# EAGLE board BusPirate-ultra.v1.0b (EAGLE 9.1.3), part 1 of 2
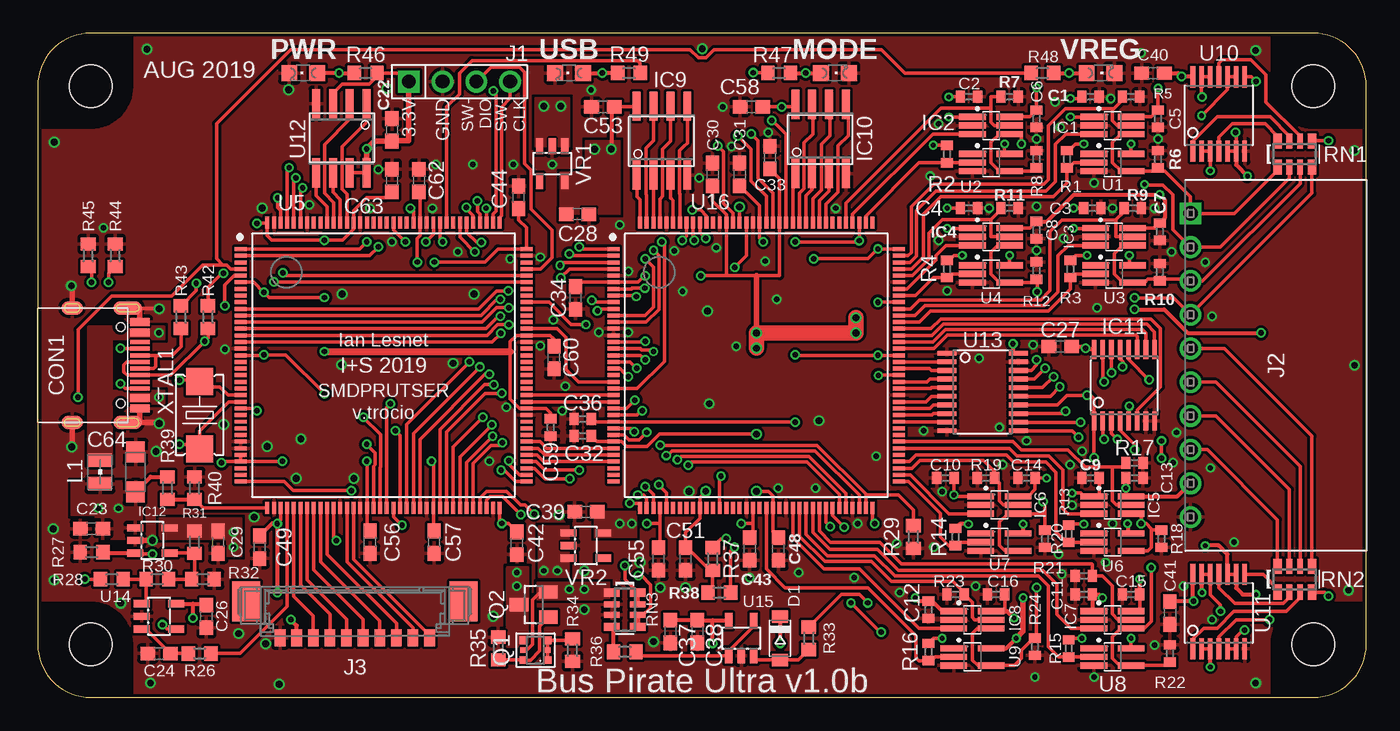
[diagram p0: board, top side]
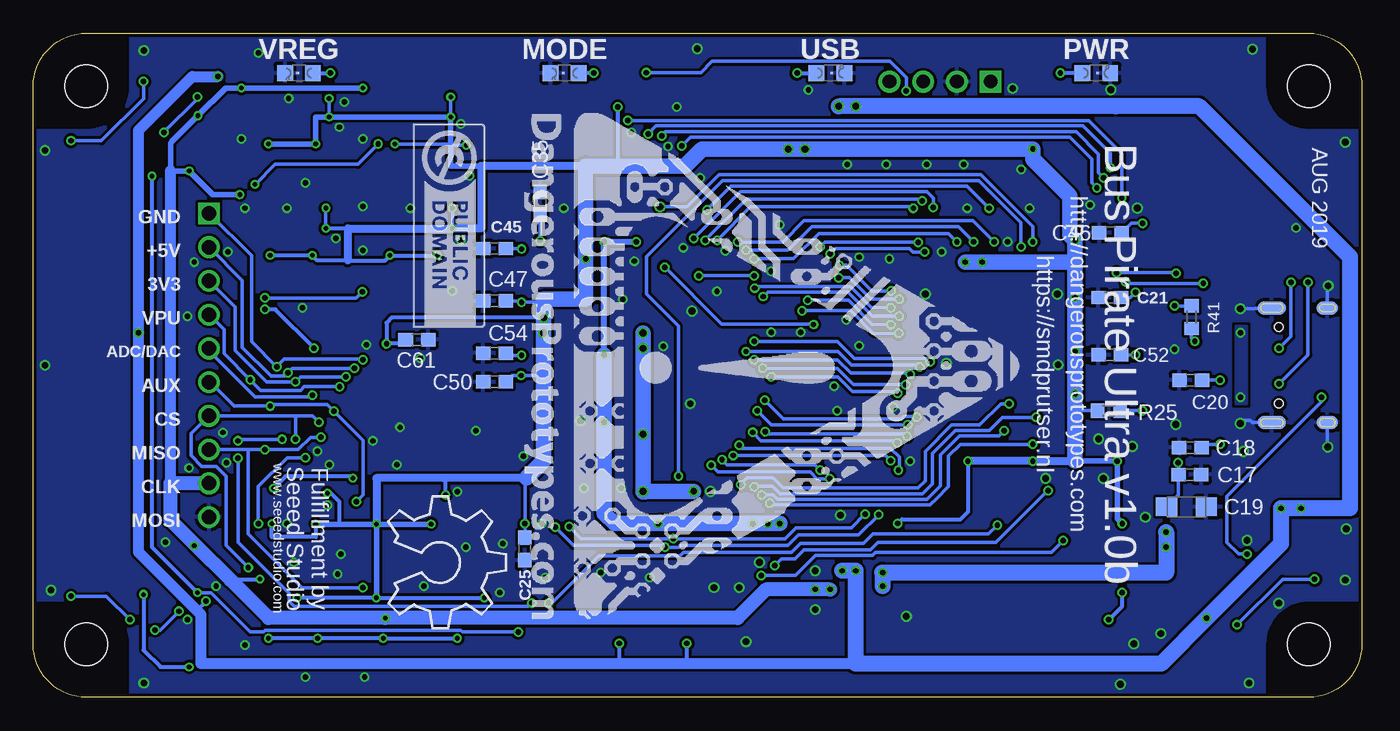
[diagram p1: board, bottom side, seen from below]

Size 100 x 50 mm. Coordinates in mm from the lower left corner, seen from the top.
Copper layers (1*16): Top 0.035mm / dielectric 1.5mm / Bottom 0.035mm
Design rules "dirt_cheap_dirty_boards.v1.1": minimum track width 6mil, minimum drill 12mil, track to track 6mil, track to pad 6mil, pad to pad 6mil, via to via 6mil, smd to smd 0mil, copper to edge 10mil, drill to drill 10mil, minimum pad ring 10mil, minimum via ring 6mil, stop-mask expansion 2mil, vias tented up to drill 25mil, thermal gap 10mil

## Footprints (pad centres in the part's own frame; a part is rotated, then mirrored left to right if it is on the bottom)
C0402 = smd 0.7 x 0.9: 1 -0.65,0; 2 0.65,0
C0603 = smd 1.1 x 1: 1 -0.85,0; 2 0.85,0
SMC_A = smd 1.6 x 1.4: + -1.5,0; - 1.5,0
C603 = smd 1.1 x 1: 1 -0.85,0; 2 0.85,0
C402 = smd 0.7 x 0.9: 1 -0.65,0; 2 0.65,0
C-31-M-12 = smd 0.3 x 1.45: CC1 -1.25,3.005; CC2 1.75,3.005; DN1 0.25,3.005; DN2 -0.75,3.005; DP1 -0.25,3.005; DP2 0.75,3.005; SBU1 1.25,3.005; SBU2 -1.75,3.005 | smd 0.6 x 1.45: GND@1 -3.25,3.005; GND@2 3.25,3.005; VBUS@1 -2.45,3.005; VBUS@2 2.45,3.005 | smd 1 x 2.1: P$1 4.32,2.09; P$2 -4.32,2.09 | smd 1 x 1.6: P$3 -4.32,-2.09; P$4 4.32,-2.09 | smd 1 x 2.1 bottom: P$5 -4.32,2.09; P$8 4.32,2.09 | smd 1 x 1.6 bottom: P$6 -4.32,-2.09; P$7 4.32,-2.09 | hole 0.65: 2.89,1.56; -2.89,1.56
SOD-123 = smd 0.91 x 1.22: A 1.635,0; C -1.635,0
SC-70-6_EXTENDED_PADS = smd 0.47 x 2: 1 -0.65,-1.4; 2 0,-1.4; 3 0.65,-1.4; 4 0.65,1.4; 5 0,1.4; 6 -0.65,1.4
SOIC-8 = smd 0.6 x 2.2: 1 -1.905,-2.6; 2 -0.635,-2.6; 3 0.635,-2.6; 4 1.905,-2.6; 5 1.905,2.6; 6 0.635,2.6; 7 -0.635,2.6; 8 -1.905,2.6
TSSOP-16 = smd 0.35 x 1.43: 1 -2.275,-2.7; 2 -1.625,-2.7; 3 -0.975,-2.7; 4 -0.325,-2.7; 5 0.325,-2.7; 6 0.975,-2.7; 7 1.625,-2.7; 8 2.275,-2.7; 9 2.275,2.7; 10 1.625,2.7; 11 0.975,2.7; 12 0.325,2.7; 13 -0.325,2.7; 14 -0.975,2.7; 15 -1.625,2.7; 16 -2.275,2.7
SOT-23-5 = smd 0.55 x 1.2: 1 -0.95,-1.3; 2 0,-1.3; 3 0.95,-1.3; 4 0.95,1.3; 5 -0.95,1.3
M1X4 = drill 1.02 pad 1.632 square: 1 0,0 | drill 1.02 pad 1.632: 2 2.54,0; 3 5.08,0; 4 7.62,0
M1X10_MALE_RIGHT_ANGLES_PTH_SHROUDED = drill 1.09 square: 1 -11.43,-6.415 | drill 1.09: 2 -8.89,-6.415; 3 -6.35,-6.415; 4 -3.81,-6.415; 5 -1.27,-6.415; 6 1.27,-6.415; 7 3.81,-6.415; 8 6.35,-6.415; 9 8.89,-6.415; 10 11.43,-6.415
MOLEX_533980771 = smd 2.1 x 3: B1 -8.175,1.513; B2 8.175,1.513 | smd 0.8 x 1.3: P1 5.625,-1.238; P2 4.375,-1.238; P3 3.125,-1.238; P4 1.875,-1.238; P5 0.625,-1.238; P6 -0.625,-1.238; P7 -1.875,-1.238; P8 -3.125,-1.238; P9 -4.375,-1.238; P10 -5.625,-1.238
WE-KI_0805_B = smd 1.02 x 1.78: 1 -0.89,0; 2 0.89,0
LED-805 = smd 1.2 x 1.2: A 0,-1.05; C 0,1.05
DP10050_V1 = hole 3.2: 4,4; 96,4; 96,46; 4,46
SOT-363 = smd 0.6 x 0.6: 1 -0.75,-0.9; 3 0.75,-0.9; 4 0.75,0.9; 6 -0.75,0.9 | smd 0.4 x 0.5: 2 0,-0.9; 5 0,0.9
SOT-23 = smd 1 x 1.4: 1 -0.95,-1.1; 2 0.95,-1.1; 3 0,1.1
R0402 = smd 0.7 x 0.9: 1 -0.65,0; 2 0.65,0
R603 = smd 1 x 1.1: 1 -0.85,0; 2 0.85,0
R0603 = smd 1 x 1.1: 1 -0.85,0; 2 0.85,0
RN8P-4R-CRA06S = smd 0.63 x 1.15: 1 -1.295,-0.975; 4 1.295,-0.975; 5 1.295,0.975; 8 -1.295,0.975 | smd 0.44 x 1.15: 2 -0.4,-0.975; 3 0.4,-0.975; 6 0.4,0.975; 7 -0.4,0.975
SC-70-5_EXTENDED_PADS = smd 0.47 x 2: 1 -0.65,-1.4; 2 0,-1.4; 3 0.65,-1.4; 4 0.65,1.4; 5 -0.65,1.4
TQFP-144 = smd 0.9 x 0.3: 1 -10.75,8.75; 2 -10.75,8.25; 3 -10.75,7.75; 4 -10.75,7.25; 5 -10.75,6.75; 6 -10.75,6.25; 7 -10.75,5.75; 8 -10.75,5.25; 9 -10.75,4.75; 10 -10.75,4.25; 11 -10.75,3.75; 12 -10.75,3.25; 13 -10.75,2.75; 14 -10.75,2.25; 15 -10.75,1.75; 16 -10.75,1.25; 17 -10.75,0.75; 18 -10.75,0.25; 19 -10.75,-0.25; 20 -10.75,-0.75; 21 -10.75,-1.25; 22 -10.75,-1.75; 23 -10.75,-2.25; 24 -10.75,-2.75; 25 -10.75,-3.25; 26 -10.75,-3.75; 27 -10.75,-4.25; 28 -10.75,-4.75; 29 -10.75,-5.25; 30 -10.75,-5.75; 31 -10.75,-6.25; 32 -10.75,-6.75; 33 -10.75,-7.25; 34 -10.75,-7.75; 35 -10.75,-8.25; 36 -10.75,-8.75; 73 10.75,-8.75; 74 10.75,-8.25; 75 10.75,-7.75; 76 10.75,-7.25; 77 10.75,-6.75; 78 10.75,-6.25; 79 10.75,-5.75; 80 10.75,-5.25; 81 10.75,-4.75; 82 10.75,-4.25; 83 10.75,-3.75; 84 10.75,-3.25; 85 10.75,-2.75; 86 10.75,-2.25; 87 10.75,-1.75; 88 10.75,-1.25; 89 10.75,-0.75; 90 10.75,-0.25; 91 10.75,0.25; 92 10.75,0.75; 93 10.75,1.25; 94 10.75,1.75; 95 10.75,2.25; 96 10.75,2.75; 97 10.75,3.25; 98 10.75,3.75; 99 10.75,4.25; 100 10.75,4.75; 101 10.75,5.25; 102 10.75,5.75; 103 10.75,6.25; 104 10.75,6.75; 105 10.75,7.25; 106 10.75,7.75; 107 10.75,8.25; 108 10.75,8.75 | smd 0.3 x 0.9: 37 -8.75,-10.75; 38 -8.25,-10.75; 39 -7.75,-10.75; 40 -7.25,-10.75; 41 -6.75,-10.75; 42 -6.25,-10.75; 43 -5.75,-10.75; 44 -5.25,-10.75; 45 -4.75,-10.75; 46 -4.25,-10.75; 47 -3.75,-10.75; 48 -3.25,-10.75; 49 -2.75,-10.75; 50 -2.25,-10.75; 51 -1.75,-10.75; 52 -1.25,-10.75; 53 -0.75,-10.75; 54 -0.25,-10.75; 55 0.25,-10.75; 56 0.75,-10.75; 57 1.25,-10.75; 58 1.75,-10.75; 59 2.25,-10.75; 60 2.75,-10.75; 61 3.25,-10.75; 62 3.75,-10.75; 63 4.25,-10.75; 64 4.75,-10.75; 65 5.25,-10.75; 66 5.75,-10.75; 67 6.25,-10.75; 68 6.75,-10.75; 69 7.25,-10.75; 70 7.75,-10.75; 71 8.25,-10.75; 72 8.75,-10.75; 109 8.75,10.75; 110 8.25,10.75; 111 7.75,10.75; 112 7.25,10.75; 113 6.75,10.75; 114 6.25,10.75; 115 5.75,10.75; 116 5.25,10.75; 117 4.75,10.75; 118 4.25,10.75; 119 3.75,10.75; 120 3.25,10.75; 121 2.75,10.75; 122 2.25,10.75; 123 1.75,10.75; 124 1.25,10.75; 125 0.75,10.75; 126 0.25,10.75; 127 -0.25,10.75; 128 -0.75,10.75; 129 -1.25,10.75; 130 -1.75,10.75; 131 -2.25,10.75; 132 -2.75,10.75; 133 -3.25,10.75; 134 -3.75,10.75; 135 -4.25,10.75; 136 -4.75,10.75; 137 -5.25,10.75; 138 -5.75,10.75; 139 -6.25,10.75; 140 -6.75,10.75; 141 -7.25,10.75; 142 -7.75,10.75; 143 -8.25,10.75; 144 -8.75,10.75
TSSOP-14 = smd 0.35 x 1.6: 1 -1.95,-2.7; 2 -1.3,-2.7; 3 -0.65,-2.7; 4 0,-2.7; 5 0.65,-2.7; 6 1.3,-2.7; 7 1.95,-2.7; 8 1.95,2.9; 9 1.3,2.9; 10 0.65,2.9; 11 0,2.9; 12 -0.65,2.9; 13 -1.3,2.9; 14 -1.95,2.9
TSSOP-20 = smd 0.35 x 1.43: 1 -2.925,-2.7; 2 -2.275,-2.7; 3 -1.625,-2.7; 4 -0.975,-2.7; 5 -0.325,-2.7; 6 0.325,-2.7; 7 0.975,-2.7; 8 1.625,-2.7; 9 2.275,-2.7; 10 2.925,-2.7; 11 2.925,2.7; 12 2.275,2.7; 13 1.625,2.7; 14 0.975,2.7; 15 0.325,2.7; 16 -0.325,2.7; 17 -0.975,2.7; 18 -1.625,2.7; 19 -2.275,2.7; 20 -2.925,2.7
SOT-23-5@1 = smd 0.55 x 1.2: 1 -0.95,-1.3; 2 0,-1.3; 3 0.95,-1.3; 4 0.95,1.3; 5 -0.95,1.3
XTAL_4X6 = smd 2.032 x 2.032: 1 -2.54,0; 2 2.54,0

## Placement (x,y rotation side)
C1  0.1uF  [C0402]  79.25,45.21 0 top
C2  0.1uF  [C0402]  70.1,45.21 0 top
C3  0.1uF  [C0402]  79.38,36.83 0 top
C4  0.1uF  [C0402]  70.1,36.83 0 top
C5  0.1uF  [C0402]  84.33,43.56 90 top
C6  0.1uF  [C0402]  75.18,43.56 90 top
C7  0.1uF  [C0402]  84.45,35.05 90 top
C8  0.1uF  [C0402]  75.18,35.18 90 top
C9  0.1uF  [C0402]  79.25,16.51 180 top
C10  0.1uF  [C0402]  68.33,16.51 180 top
C11  0.1uF  [C0402]  78.74,7.75 180 top
C12  0.1uF  [C0402]  67.06,6.6 270 top
C13  0.1uF  [C0402]  82.55,16.51 180 top
C14  0.1uF  [C0402]  74.42,16.51 0 top
C15  0.1uF  [C0402]  82.3,7.75 0 top
C16  0.1uF  [C0402]  72.14,7.75 0 top
C17  0.1uF  [C0603]  12.95,16.76 180 bottom
C18  22pF  [C0603]  12.91,18.8 0 bottom
C19  1uF  [SMC_A]  13.21,14.35 0 bottom
C20  22pF  [C0603]  12.88,23.88 0 bottom
C21  0.1uF  [C0603]  18.97,30.1 0 bottom
C22  0.1uF  [C0603]  26.67,42.72 270 top
C23  10uF  [C603]  4.06,12.7 180 top
C24  [C0603]  9.14,3.3 180 top
C25  0.1uF  [C0603]  62.99,11.18 90 bottom
C26  0.1uF  [C0603]  12.7,6.1 270 top
C27  0.1uF  [C0603]  76.96,26.42 180 top
C28  1uf  [C0603]  40.64,36.37 0 top
C29  1uF  [C603]  13.59,11.68 270 top
C30  0.1uF  [C0603]  50.8,39.37 270 top
C31  0.1uF  [C0603]  52.83,39.37 270 top
C32  0.1uF  [C402]  41.02,19.68 180 top
C33  0.1uF  [C0603]  55.12,40.64 270 top
C34  0.1uF  [C0603]  40.49,30.07 90 top
C35  0.1uF  [C0603]  61.85,37.21 270 bottom
C36  0.1uF  [C402]  41.02,20.95 180 top
C37  0.1uF  [C0603]  47.62,4.95 270 top
C38  1uF  [C0603]  49.66,4.95 270 top
C39  1uf  [C0603]  41.27,13.97 180 top
C40  0.1uF  [C0603]  83.95,46.99 180 top
C41  0.1uF  [C0603]  85.22,6.35 270 top
C42  0.1uF  [C0603]  36.07,11.61 90 top
C43  0.1uF  [C0603]  53.59,11.18 90 top
C44  0.1uF  [C0603]  36.2,37.64 270 top
C45  0.1uF  [C0603]  65.28,33.78 0 bottom
C46  0.1uF  [C0603]  18.92,34.97 0 bottom
C47  0.1uF  [C0603]  65.28,29.84 0 bottom
C48  0.1uF  [C0603]  55.75,11.18 90 top
C49  0.1uF  [C0603]  16.72,11.3 90 top
C50  0.1uF  [C0603]  65.28,23.75 0 bottom
C51  0.1uF  [C0603]  48.77,10.41 90 top
C52  0.1uF  [C0603]  18.97,25.78 0 bottom
C53  0.1uF  [C0603]  42.55,44.45 180 top
C54  0.1uF  [C0603]  65.28,25.91 0 bottom
C55  0.1uF  [C0603]  46.74,10.41 90 top
C56  0.1uF  [C0603]  25.02,11.68 90 top
C57  0.1uF  [C0603]  29.84,11.68 90 top
C58  0.1uF  [C0603]  53.72,44.45 180 top
C59  0.1uF  [C402]  38.61,20.32 270 top
C60  0.1uF  [C0603]  38.86,25.57 90 top
C61  0.1uF  [C0603]  71.12,26.92 0 bottom
C62  0.1uF  [C0603]  28.7,38.91 270 top
C63  0.1uF  [C0603]  26.67,38.91 270 top
C64  10uF  [SMC_A]  7.37,16.97 90 top
CON1  USB-C-12  [C-31-M-12]  4.69,25 270 top
D1  [SOD-123]  55.88,4.45 270 top
IC1  SN74LVC1T45DBV  [SC-70-6_EXTENDED_PADS]  80.9,43.05 270 top
IC2  SN74LVC1T45DBV  [SC-70-6_EXTENDED_PADS]  71.75,43.05 270 top
IC3  SN74LVC1T45DBV  [SC-70-6_EXTENDED_PADS]  81.03,34.67 270 top
IC4  SN74LVC1T45DBV  [SC-70-6_EXTENDED_PADS]  71.75,34.67 270 top
IC5  SN74LVC1T45DBV  [SC-70-6_EXTENDED_PADS]  80.9,14.48 270 top
IC6  SN74LVC1T45DBV  [SC-70-6_EXTENDED_PADS]  72.39,14.48 270 top
IC7  SN74LVC1T45DBV  [SC-70-6_EXTENDED_PADS]  80.9,5.84 270 top
IC8  SN74LVC1T45DBV  [SC-70-6_EXTENDED_PADS]  70.36,5.84 270 top
IC9  23LC1024  [SOIC-8]  46.99,41.91 0 top
IC10  23LC1024  [SOIC-8]  58.93,42.04 0 top
IC11  74HCT4051  [TSSOP-16]  81.79,23.5 0 top
IC12  MCP1824_ADJ  [SOT-23-5]  8.64,11.81 270 top
J1  CON_HEADER_1X04  [M1X4]  27.94,46.35 0 top
J2  CON_HEADER_1X10-RIGHT_ANGLED_PTH_SHROUDED  [M1X10_MALE_RIGHT_ANGLES_PTH_SHROUDED]  93.19,25 270 top
J3  CON_MOLEX_MALE_SMT_SH_1.25  [MOLEX_533980771]  23.88,5.71 0 top
L1  1.5A  [WE-KI_0805_B]  4.7,16.97 90 top
LED1  Optional YELLOW  [LED-805]  20,47 270 bottom
LED2  YELLOW  [LED-805]  20,47 90 top
LED3  YELLOW  [LED-805]  60,47 270 top
LED4  Optional YELLOW  [LED-805]  60,47 90 bottom
LED5  YELLOW  [LED-805]  80,47 270 top
LED6  Optional YELLOW  [LED-805]  80,47 90 bottom
LED7  YELLOW  [LED-805]  40,47 90 top
LED8  Optional YELLOW  [LED-805]  40,47 270 bottom
LOGO1  LOGO_CC-0  [LOGO_CC-0]  71.37,43.18 270 bottom
PCB1  PCB_DP_RECTANGLE-50X100  [DP10050_V1]  0,0 0 top
Q1  DMMT3906W  [SOT-363]  37.47,3.56 90 top
Q2  [SOT-23]  37.34,6.99 90 top
R1  100K  [R0402]  77.47,40.51 90 top
R2  100K  [R0402]  68.45,40.89 90 top
R3  100K  [R0402]  77.72,32.26 90 top
R4  100K  [R0402]  68.45,32.26 90 top
R5  100K  [R0402]  82.3,45.21 180 top
R6  1M  [R0402]  84.33,40.51 270 top
R7  100K  [R0402]  73.15,45.21 180 top
R8  1M  [R0402]  75.18,40.51 270 top
R9  100K  [R0402]  82.42,36.83 180 top
R10  1M  [R0402]  84.45,32 270 top
R11  100K  [R0402]  73.15,36.83 180 top
R12  1M  [R0402]  75.18,32.13 270 top
R13  100K  [R0402]  77.6,12.32 90 top
R14  100K  [R0402]  69.09,12.06 90 top
R15  100K  [R0402]  77.6,3.68 90 top
R16  100K  [R0402]  67.06,3.41 90 top
R17  100K  [R0402]  82.55,17.65 180 top
R18  1M  [R0402]  84.58,11.94 90 top
R19  100K  [R0402]  71.37,16.51 0 top
R20  1M  [R0402]  75.82,11.94 90 top
R21  100K  [R0402]  78.74,9.14 0 top
R22  1M  [R0402]  85.22,3.3 270 top
R23  100K  [R0402]  69.09,7.75 0 top
R24  1M  [R0402]  75.06,3.81 90 top
R25  10K  [R603]  19.05,21.59 180 bottom
R26  [R0603]  12.19,3.3 180 top
R27  10K  [R603]  4.06,10.92 180 top
R28  0R  [R603]  5.59,8.89 0 top
R29  10K  [R0603]  65.91,12.06 90 top
R30  78.7K  [R603]  9.02,8.89 0 top
R31  100K  [R603]  11.81,11.68 90 top
R32  50K  [R603]  12.45,8.89 0 top
R33  [R0603]  58.04,4.45 270 top
R34  [R603]  40.26,3.56 90 top
R35  [R603]  34.67,3.68 270 top
R36  [R0603]  44.2,3.43 180 top
R37  10K  [R0603]  50.8,10.41 270 top
R38  10K  [R0603]  51.31,7.87 180 top
R39  10K  [R0603]  9.78,15.75 270 top
R40  10K  [R0603]  11.81,15.75 270 top
R41  1.5K  [R0603]  12.83,28.62 90 bottom
R42  22R  [R0603]  12.83,28.62 270 top
R43  22R  [R0603]  10.79,28.62 270 top
R44  5K1  [R0603]  5.84,33.27 90 top
R45  5K1  [R0603]  3.81,33.27 90 top
R46  1K1  [R603]  24.7,47 0 top
R47  1K1  [R603]  55.81,47 180 top
R48  1K1  [R603]  75.62,47 180 top
R49  1K1  [R603]  44.51,47 0 top
RN1  2K  [RN8P-4R-CRA06S]  94.61,40.89 0 top
RN2  2K  [RN8P-4R-CRA06S]  94.61,8.89 0 top
RN3  10K  [RN8P-4R-CRA06S]  44.2,6.6 270 top
U1  74LVC1G07DBV  [SC-70-5_EXTENDED_PADS]  80.9,40.26 270 top
U2  74LVC1G07DBV  [SC-70-5_EXTENDED_PADS]  71.75,40.26 270 top
U3  74LVC1G07DBV  [SC-70-5_EXTENDED_PADS]  81.03,31.88 270 top
U4  74LVC1G07DBV  [SC-70-5_EXTENDED_PADS]  71.75,31.88 270 top
U5  STM32F103ZX  [TQFP-144]  26.04,25 0 top
U6  74LVC1G07DBV  [SC-70-5_EXTENDED_PADS]  80.9,11.68 270 top
U7  74LVC1G07DBV  [SC-70-5_EXTENDED_PADS]  72.39,11.68 270 top
U8  74LVC1G07DBV  [SC-70-5_EXTENDED_PADS]  80.9,3.05 270 top
U9  74LVC1G07DBV  [SC-70-5_EXTENDED_PADS]  70.36,3.05 270 top
U10  74HCT4066PW  [TSSOP-14]  88.9,43.81 0 top
U11  74HCT4066PW  [TSSOP-14]  88.9,6.35 0 top
U12  W25X40CL  [SOIC-8]  22.86,42.09 180 top
U13  74LVC245A  [TSSOP-20]  71.12,22.99 270 top
U14  MCP6001  [SOT-23-5]  9.14,6.1 270 top
U15  MCP6001  [SOT-23-5]  52.96,4.45 0 top
U16  ICE40HX4K  [TQFP-144]  54.09,25 0 top
U$1  [DP-LOGO]  61.84,-11.22 0 top  (outside the outline)
U$2  [OSHW_8X350_NOTEXT]  73.28,15.11 270 bottom
U$4  [DP_LOGO_ART_1.5X1.5]  63.01,43.98 270 bottom
VR1  MCP1801T-3302I/OT  [SOT-23-5@1]  38.73,40.18 180 top
VR2  MCP1801T-1202I/OT  [SOT-23-5@1]  41.27,11.43 270 top
XTAL1  8Mhz  [XTAL_4X6]  12.19,21.26 90 top

## Library data of the parts
C1 C5 C24 C26 = rcl; SPICEPREFIX: C
C2-C4 C6-C16 R1-R24 R33 R36 R39 R40 = resistor
C17-C22 C25 C27 C28 C30 C31 C33-C35 C37-C58 C60-C64 = rcl
C23 C29 C32 C36 C59 D1 IC1-IC8 IC11 IC12 J1-J3 LED1-LED8 Q1 Q2 R25 R27 R28 R30-R32 R34 R35 U1-U16 = dp_devices.v6
CON1 = usbc
IC9 IC10 LOGO1 R46-R49 RN1-RN3 U$4 VR1 VR2 XTAL1 = dp_devices
L1 = wuerth-elektronik
PCB1 = dp_blank_pcb
R26 R29 R37 R38 R41-R45 = rcl; SPICEPREFIX: R
U$1 = DP-logo
U$2 = ohw-logo

## Nets
1V2: C31.2 C35.2 C36.1 C39.1 C43.2 C54.2 C55.2 U16.27 U16.40 U16.54 U16.92 U16.111 U16.126 VR2.5
3V3: C1.1 C2.1 C3.1 C4.1 C9.1 C10.1 C11.1 C12.1 C17.2 C19.+ C21.2 C22.2 C25.2 C28.1 C30.2 C32.1 C33.2 C34.2 C42.2 C44.2 C45.2 C46.2 C47.2 C48.2 C49.2 C50.2 C51.2 C52.2 C53.1 C56.2 C57.2 C58.1 C59.1 C60.2 C61.1 C62.2 C63.2 IC1.1 IC2.1 IC3.1 IC4.1 IC5.1 IC6.1 IC7.1 IC8.1 IC9.8 IC10.8 J1.1 J3.P9 R1.2 R2.2 R3.2 R4.2 R13.2 R14.2 R15.2 R16.2 R25.2 R37.2 R38.2 R46.2 U1.5 U2.5 U3.5 U4.5 U5.6 U5.17 U5.32 U5.33 U5.39 U5.52 U5.62 U5.72 U5.84 U5.95 U5.108 U5.121 U5.131 U5.144 U6.5 U7.5 U8.5 U9.5 U12.3 U12.7 U12.8 U13.20 U16.6 U16.30 U16.46 U16.57 U16.72 U16.89 U16.100 U16.108 U16.123 U16.131 VR1.5
ADC1: RN3.5 RN3.6 U5.47
ADC_MUX_EN: IC11.6 U16.96
ADC_MUX_S0: IC11.11 U16.93
ADC_MUX_S1: IC11.10 U16.94
ADC_MUX_S2: IC11.9 U16.95
BPIO0: IC1.4 IC11.13 J2.1 R6.2 RN1.1 U1.4 U13.18
BPIO1: IC2.4 IC11.14 J2.2 R8.2 RN1.2 U2.4 U13.17
BPIO2: IC3.4 IC11.15 J2.3 R10.2 RN1.3 U3.4 U13.16
BPIO3: IC4.4 IC11.12 J2.4 R12.2 RN1.4 U4.4 U13.15
BPIO4: IC5.4 IC11.1 J2.5 R18.2 RN2.5 U6.4 U13.14
BPIO5: IC6.4 IC11.5 J2.6 R20.2 RN2.6 U7.4 U13.13
BPIO6: IC7.4 IC11.2 J2.7 R22.2 RN2.7 U8.4 U13.12
BPIO7: IC8.4 IC11.4 J2.8 R24.2 RN2.8 U9.4 U13.11
BUFDIR0: IC1.5 R5.2 U16.107
BUFDIR1: IC2.5 R7.2 U16.113
BUFDIR2: IC3.5 R9.2 U16.99
BUFDIR3: IC4.5 R11.2 U16.104
BUFDIR4: IC5.5 R17.2 U16.79
BUFDIR5: IC6.5 R19.2 U16.75
BUFDIR6: IC7.5 R21.2 U16.64
BUFDIR7: IC8.5 R23.2 U16.61
BUFIO0: IC1.3 U16.106
BUFIO1: IC2.3 U16.112
BUFIO2: IC3.3 U16.98
BUFIO3: IC4.3 U16.102
BUFIO4: IC5.3 U16.78
BUFIO5: IC6.3 U16.74
BUFIO6: IC7.3 U16.63
BUFIO7: IC8.3 U16.60
BUFOD0: R1.1 U1.2 U16.105
BUFOD1: R2.1 U2.2 U16.110
BUFOD2: R3.1 U3.2 U16.97
BUFOD3: R4.1 U4.2 U16.101
BUFOD4: R13.1 U6.2 U16.76
BUFOD5: R14.1 U7.2 U16.73
BUFOD6: R15.1 U8.2 U16.62
BUFOD7: R16.1 U9.2 U16.56
D+: CON1.DP1 CON1.DP2 R41.1 R42.2
D-: CON1.DN1 CON1.DN2 R43.2
DISPLAY_AUX1: J3.P5 U5.44
DISPLAY_AUX2: J3.P4 U5.45
DISPLAY_CS: J3.P1 U5.50
DISPLAY_D/P: J3.P2 U5.49
DISPLAY_PWM: J3.P3 U5.46
DISPLAY_SPI_CLOCK: J3.P8 U5.41
DISPLAY_SPI_MISO: J3.P7 U5.42
DISPLAY_SPI_MOSI: J3.P6 U5.43
FLASH_CS: U5.132 U12.1
FLASH_MISO: U5.134 U12.2
FLASH_MOSI: U5.135 U12.5
FLASH_SCK: U5.133 U12.6
FPGA_CDONE: R37.1 U5.69 U16.65
FPGA_CRESET: R38.1 U5.70 U16.66
FPGA_PROG_CLOCK: U5.74 U16.70
FPGA_PROG_CS: R29.2 U5.73 U16.71
FPGA_PROG_MISO: U5.75 U16.67
FPGA_PROG_MOSI: U5.76 U16.68
FSMC_A0: U5.10 U16.3
FSMC_A1: U5.11 U16.4
FSMC_A2: U5.12 U16.7
FSMC_A3: U5.13 U16.8
FSMC_A4: U5.14 U16.9
FSMC_A5: U5.15 U16.10
FSMC_D0: U5.85 U16.24
FSMC_D1: U5.86 U16.23
FSMC_D2: U5.114 U16.1
FSMC_D3: U5.115 U16.2
FSMC_D4: U5.58 U16.15
FSMC_D5: U5.59 U16.16
FSMC_D6: U5.60 U16.17
FSMC_D7: U5.63 U16.18
FSMC_D8: U5.64 U16.19
FSMC_D9: U5.65 U16.25
FSMC_D10: U5.66 U16.26
FSMC_D11: U5.67 U16.28
FSMC_D12: U5.68 U16.29
FSMC_D13: U5.77 U16.33
FSMC_D14: U5.78 U16.32
FSMC_D15: U5.79 U16.31
FSMC_NE3_CE: U5.125 U16.22
FSMC_NOE_OE: U5.118 U16.11
FSMC_NWE_WE: U5.119 U16.12
GND: C1.2 C2.2 C3.2 C4.2 C5.1 C6.1 C7.1 C8.1 C9.2 C10.2 C11.2 C12.2 C13.1 C14.1 C15.1 C16.1 C17.1 C18.1 C19.- C20.1 C21.1 C22.1 C23.2 C24.2 C25.1 C26.2 C27.2 C28.2 C29.2 C30.1 C31.1 C32.2 C33.1 C34.1 C35.1 C36.2 C37.2 C38.2 C39.2 C40.2 C41.2 C42.1 C43.1 C44.1 C45.1 C46.1 C47.1 C48.1 C49.1 C50.1 C51.1 C52.1 C53.2 C54.1 C55.1 C56.1 C57.1 C58.2 C59.2 C60.1 C61.2 C62.1 C63.1 C64.- CON1.GND@1 CON1.GND@2 CON1.P$1 CON1.P$2 CON1.P$3 CON1.P$4 CON1.P$5 CON1.P$6 CON1.P$7 CON1.P$8 IC1.2 IC2.2 IC3.2 IC4.2 IC5.2 IC6.2 IC7.2 IC8.2 IC9.4 IC10.4 IC11.7 IC11.8 IC12.2 J1.2 J2.10 J3.P10 LED1.C LED2.C LED3.C LED4.C LED5.C LED6.C LED7.C LED8.C R5.1 R6.1 R7.1 R8.1 R9.1 R10.1 R11.1 R12.1 R17.1 R18.1 R19.1 R20.1 R21.1 R22.1 R23.1 R24.1 R27.2 R29.1 R32.2 R34.1 R35.1 R40.1 R44.2 R45.2 RN3.2 RN3.3 U1.3 U2.3 U3.3 U4.3 U5.16 U5.30 U5.31 U5.38 U5.48 U5.51 U5.61 U5.71 U5.83 U5.94 U5.107 U5.120 U5.130 U5.138 U5.143 U6.3 U7.3 U8.3 U9.3 U10.7 U11.7 U12.4 U13.1 U13.10 U13.19 U14.2 U15.2 U16.5 U16.13 U16.14 U16.53 U16.59 U16.69 U16.86 U16.103 U16.127 U16.132 U16.140 VR1.2 VR2.2
LAT0: U13.2 U16.91
LAT1: U13.3 U16.90
LAT2: U13.4 U16.88
LAT3: U13.5 U16.87
LAT4: U13.6 U16.85
LAT5: U13.7 U16.84
LAT6: U13.8 U16.83
LAT7: U13.9 U16.82
LD1: R47.2 U5.110
MCU_ADC5: R39.2 R40.2 U5.37
MCU_ADC6: RN3.7 RN3.8 U5.36
MCU_AUX1: U5.111 U16.137
MCU_AUX2: U5.112 U16.136
MCU_AUX3: U5.113 U16.135
MCU_AUX4: U5.122 U16.134
MCU_AUX5: U5.139 U16.130
MCU_AUX6: U5.140 U16.125
MCU_AUX7: U5.141 U16.124
MCU_AUX8: U5.142 U16.122
MCU_AUX9: U5.53 U16.37
MCU_AUX10: U5.57 U16.38
MCU_AUX11: U5.54 U16.39
MCU_AUX12: U5.55 U16.41
MCU_INT0: U5.1 U16.129
MCU_INT1: U5.2 U16.49
MCU_MCO: U5.100 U16.128
MCU_VPU: U5.56 U10.5 U10.6 U10.12 U10.13 U11.5 U11.6 U11.12 U11.13
N$1: CON1.VBUS@1 CON1.VBUS@2 L1.2
N$2: RN1.7 U10.1
N$3: RN1.8 U10.4
N$4: RN1.5 U10.8
N$5: RN1.6 U10.11
N$6: LED3.A LED4.A R47.1
N$7: LED1.A LED2.A R46.1
N$8: C20.2 U5.23 XTAL1.2
N$9: C18.2 U5.24 XTAL1.1
N$10: U5.35
N$11: Q1.6 Q2.1 R35.2
N$12: IC12.4 R30.2 R31.1 R32.1
N$13: LED7.A LED8.A R49.1
N$14: CON1.CC1 R44.1
N$15: R28.1 U14.4
N$16: U5.9
N$17: U16.34
N$18: LED5.A LED6.A R48.1
N$19: U5.97
N$20: CON1.CC2 R45.1
N$21: R36.2 RN3.4
N$22: U5.98
N$23: U5.28
N$25: R28.2 R30.1 U14.1
N$26: C29.1 IC12.5 Q1.4 Q2.3 R31.2
N$27: Q1.1 Q1.2 Q1.3 R34.2
N$28: U5.80
N$29: U5.116
N$30: U5.26
N$31: C24.1 R26.2 U14.3
N$32: D1.A R33.2 U15.3
N$33: RN2.3 U11.1
N$34: U5.82
N$35: U5.27
N$36: U5.18
N$37: U5.19
N$38: U5.20
N$39: U5.21
N$40: U5.22
N$41: U5.99
N$42: RN2.4 U11.4
N$43: U5.81
N$44: RN2.1 U11.8
N$45: RN2.2 U11.11
N$52: U5.90
N$53: U5.93
N$54: U5.124
N$56: U5.123
N$57: U5.126
N$58: U5.127
N$59: U5.128
N$60: U5.129
N$61: IC11.3 R33.1
N$64: R36.1 U15.1 U15.4
PWM: U5.96 U16.21
RST: R25.1 U5.25
SRAM0_CLOCK: IC9.6 U16.141
SRAM0_CS: IC9.1 U16.144
SRAM0_SIO0: IC9.5 U16.138
SRAM0_SIO1: IC9.2 U16.142
SRAM0_SIO2: IC9.3 U16.139
SRAM0_SIO3: IC9.7 U16.143
SRAM1_CLOCK: IC10.6 U16.118
SRAM1_CS: IC10.1 U16.121
SRAM1_SIO0: IC10.5 U16.116
SRAM1_SIO1: IC10.2 U16.119
SRAM1_SIO2: IC10.3 U16.117
SRAM1_SIO3: IC10.7 U16.120
SWCLK: J1.4 U5.109
SWDIO: J1.3 U5.105
UART_RX: U5.102
UART_TX: U5.101
USB_D+: R42.1 U5.104
USB_D-: R43.1 U5.103
USB_DET: R41.2 U5.5
USBLED: R49.2 U5.117
VPP_FAST: U16.109
VREF/VOUT: C5.2 C6.2 C7.2 C8.2 C13.2 C14.2 C15.2 C16.2 IC1.6 IC2.6 IC3.6 IC4.6 IC5.6 IC6.6 IC7.6 IC8.6 J2.9 Q1.5 Q2.2 RN3.1 U10.2 U10.3 U10.9 U10.10 U11.2 U11.3 U11.9 U11.10
VREG_DAC: R26.1 U5.40
VREGEN: IC12.3 R27.1 R48.2 U5.4
VUSB: C23.1 C26.1 C27.1 C37.1 C38.1 C40.1 C41.1 C64.+ D1.C IC11.16 IC12.1 L1.1 R39.1 U10.14 U11.14 U14.5 U15.5 VR1.1 VR1.3 VR2.1 VR2.3